# Altium PCB QI9-2604-A01_.PcbDoc (part 1 of 2)
Units mm, origin at the board's own origin, x right, y up, seen from the top; angles counter-clockwise.
Board outline 152.4 x 101.6 mm, 2 copper layers (Top Layer, Bottom Layer); 241 components, 189 nets, 865 pads, 74 vias.
Unrouted connection lines stored in the file: 153.
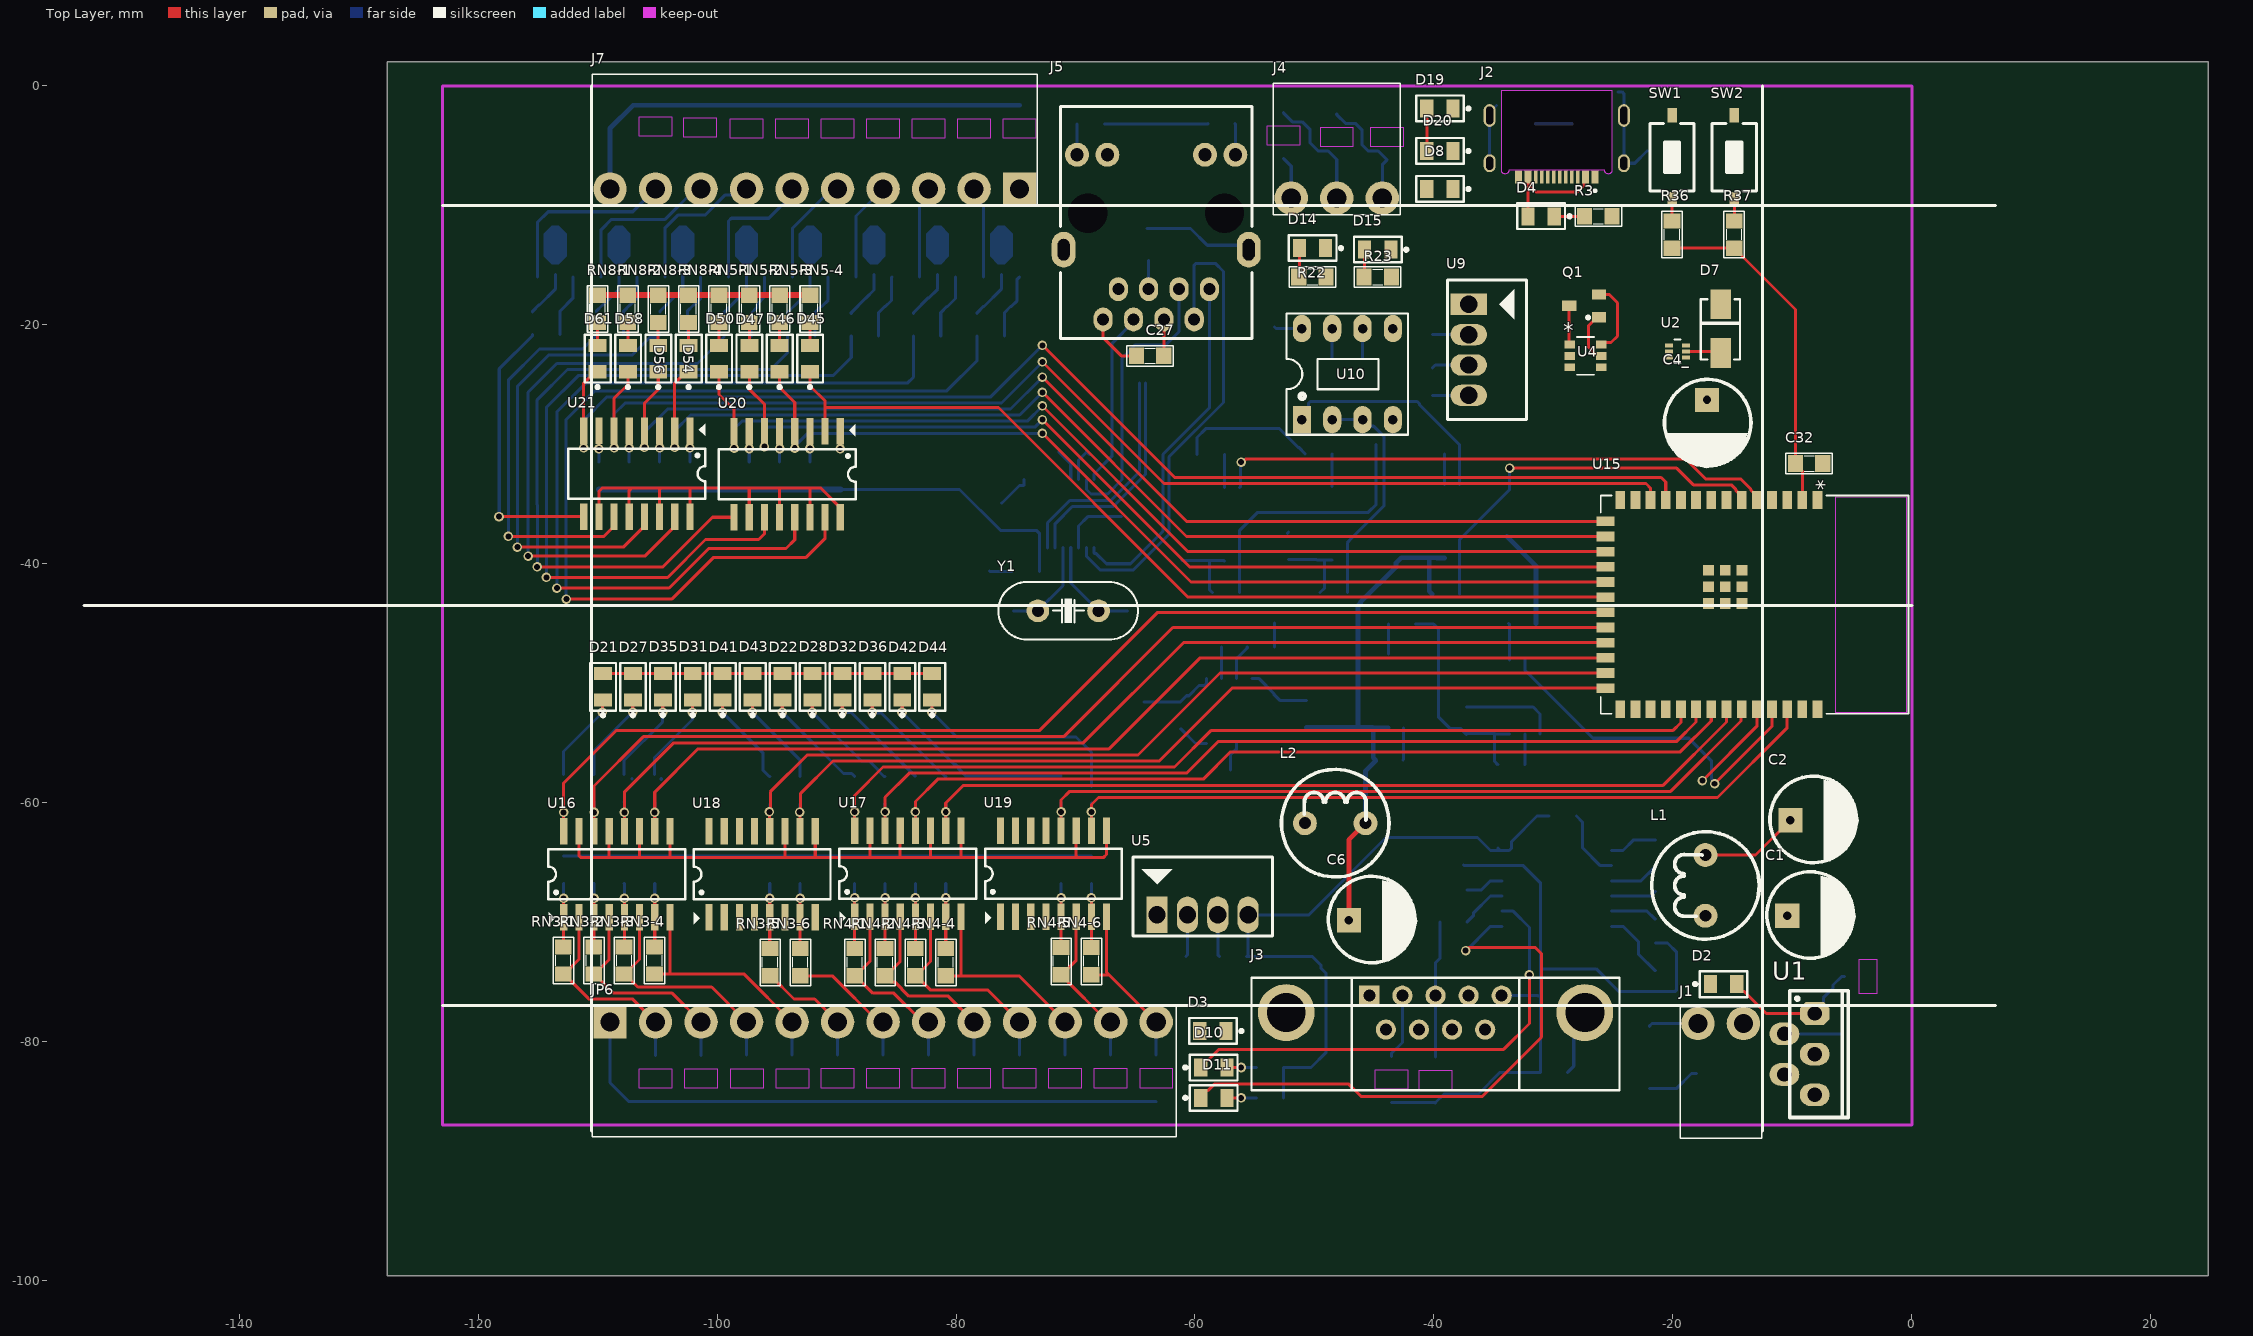
[diagram p0: Top Layer view]
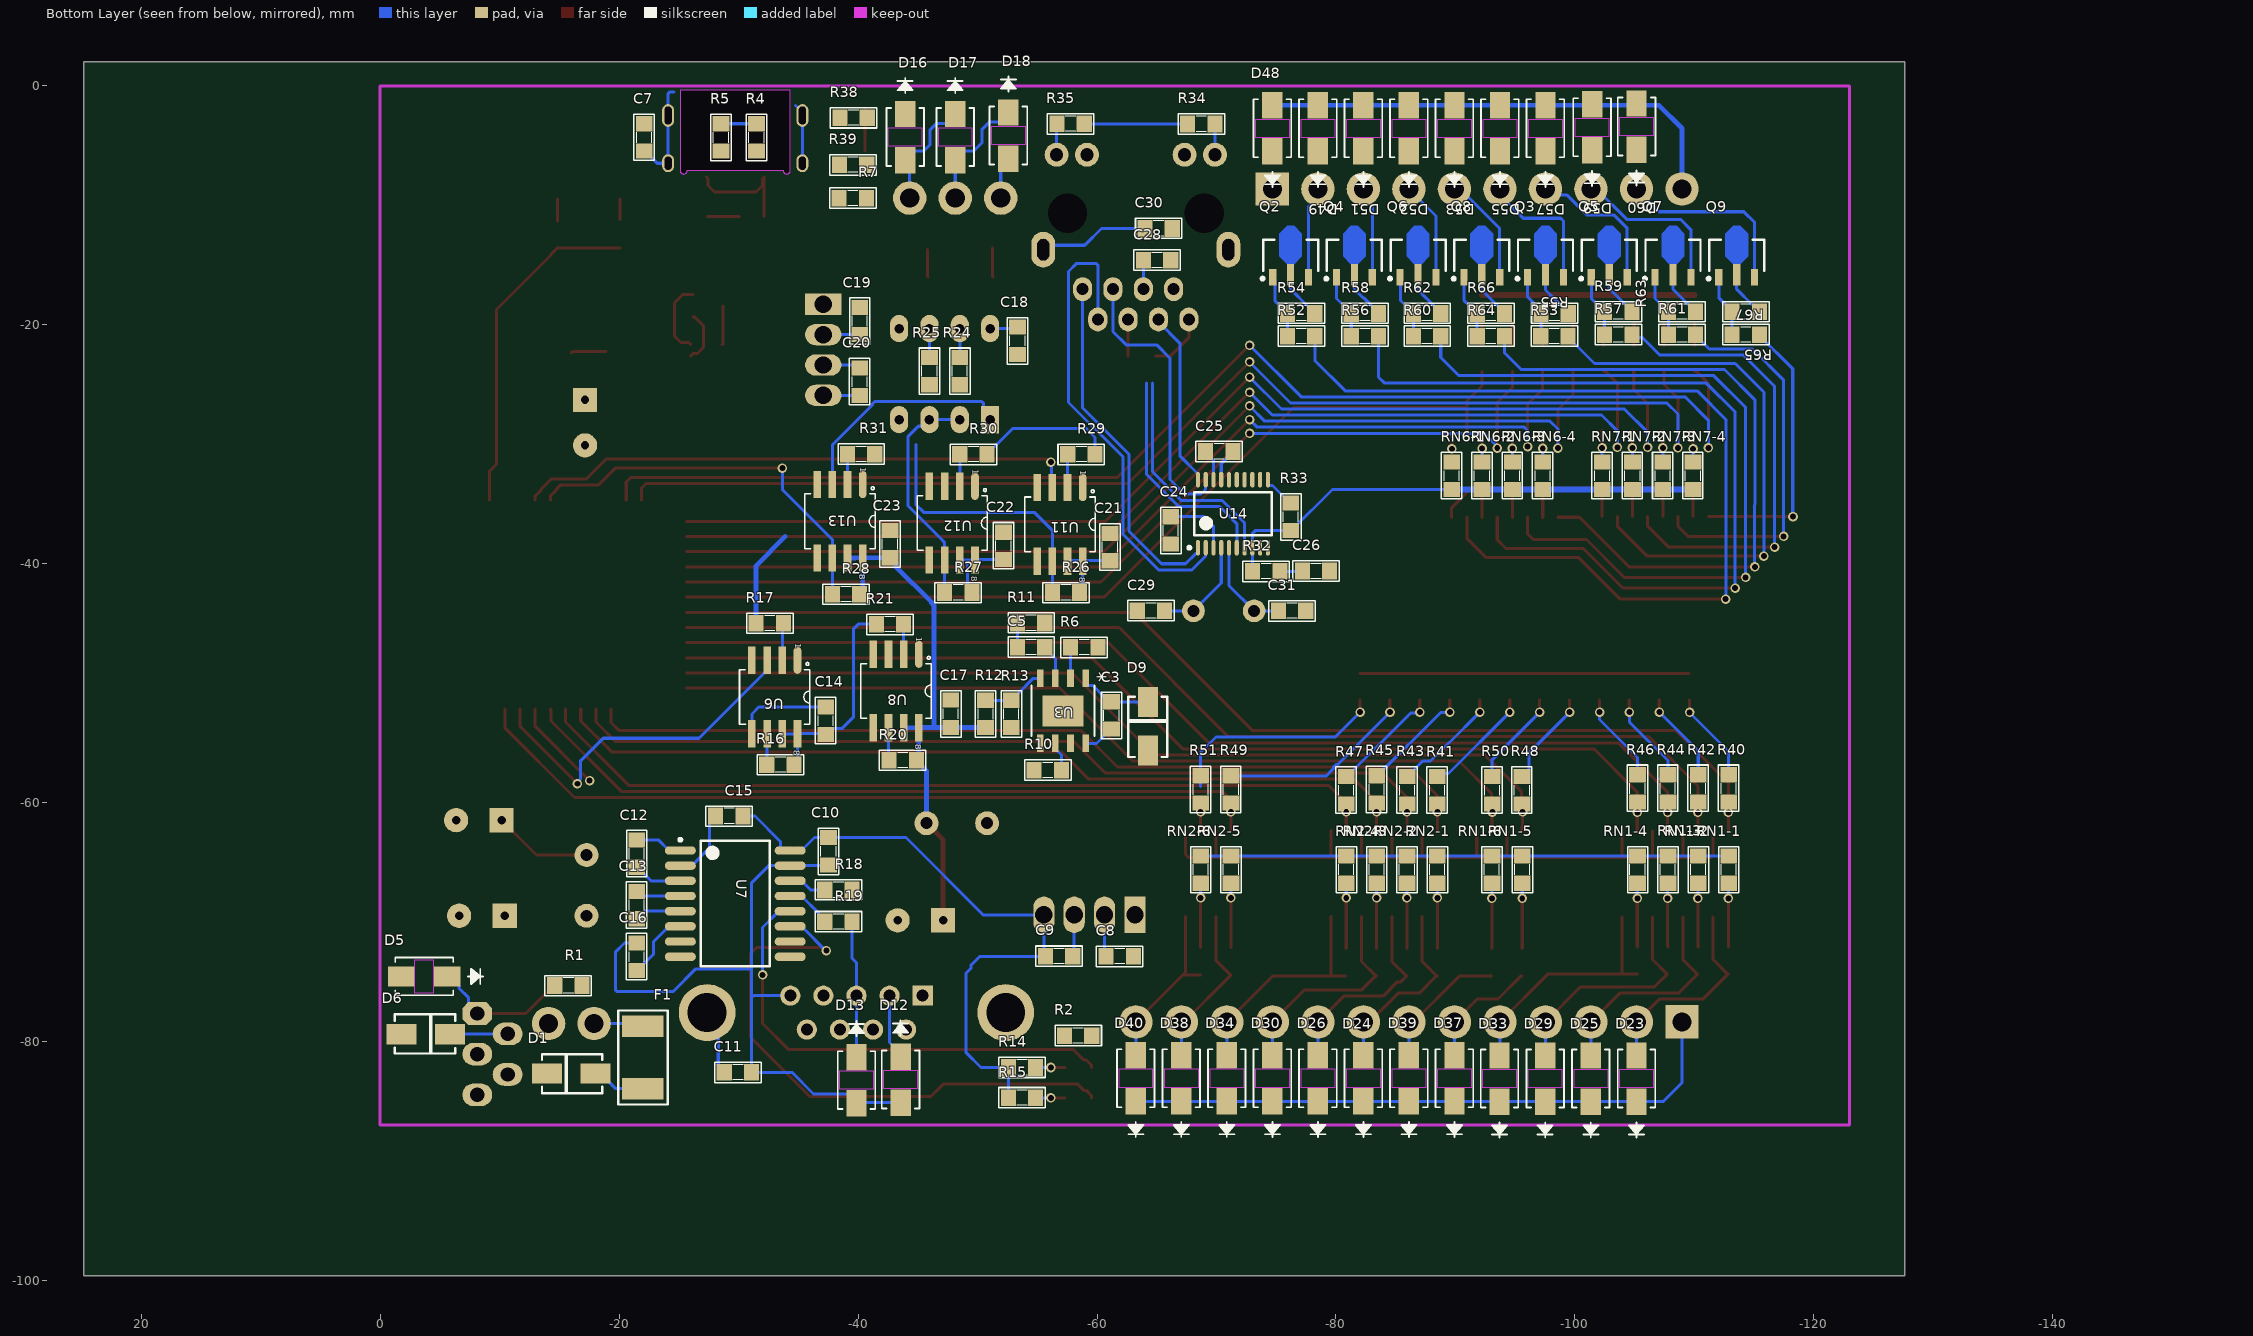
[diagram p1: Bottom Layer view, seen from below]
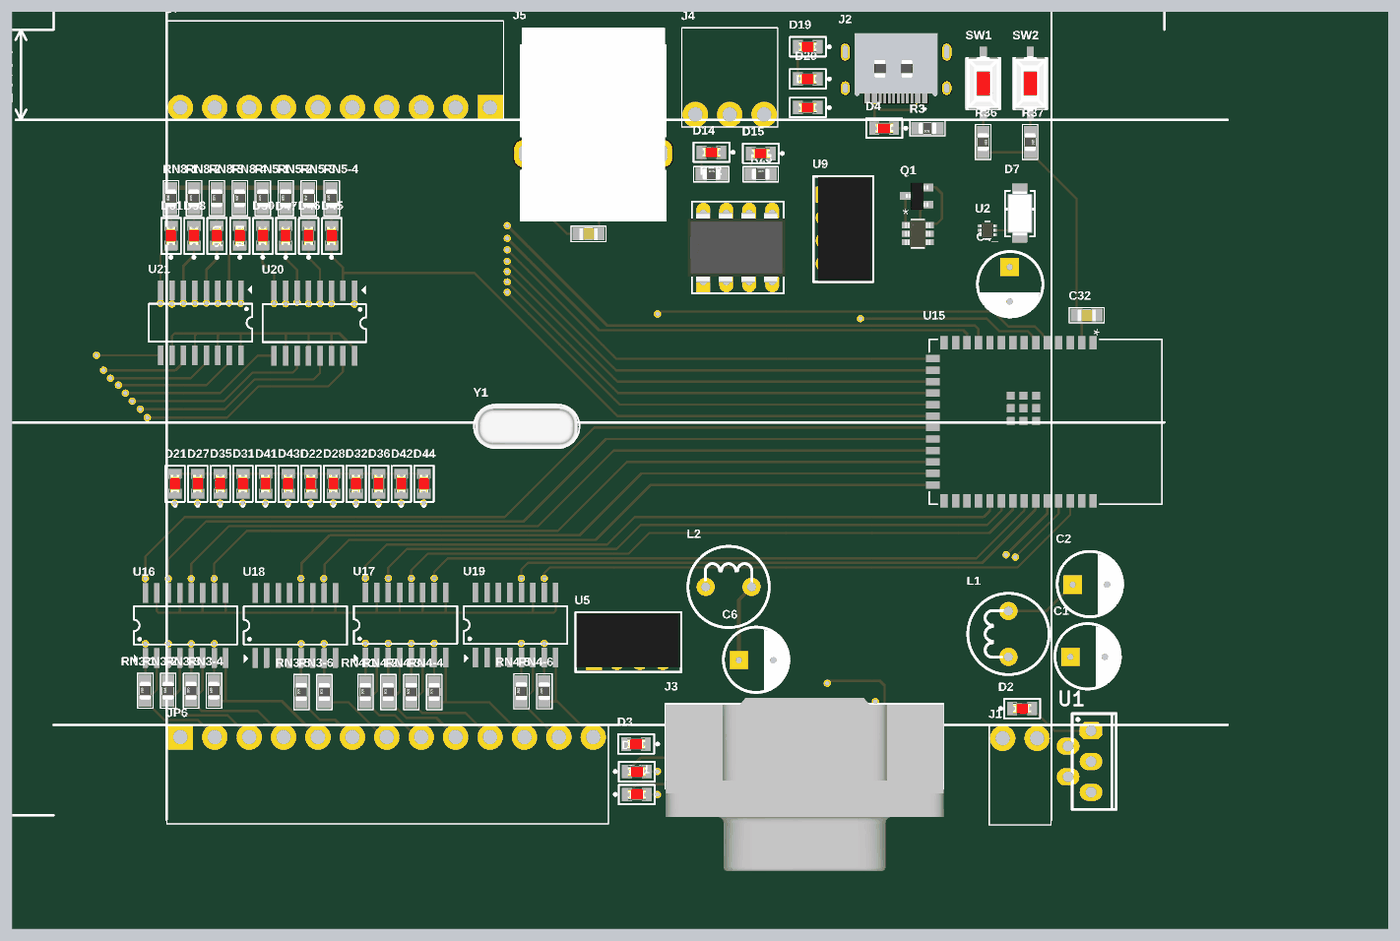
[diagram p3: 3D render of the assembled board from above, using the file's embedded part models]
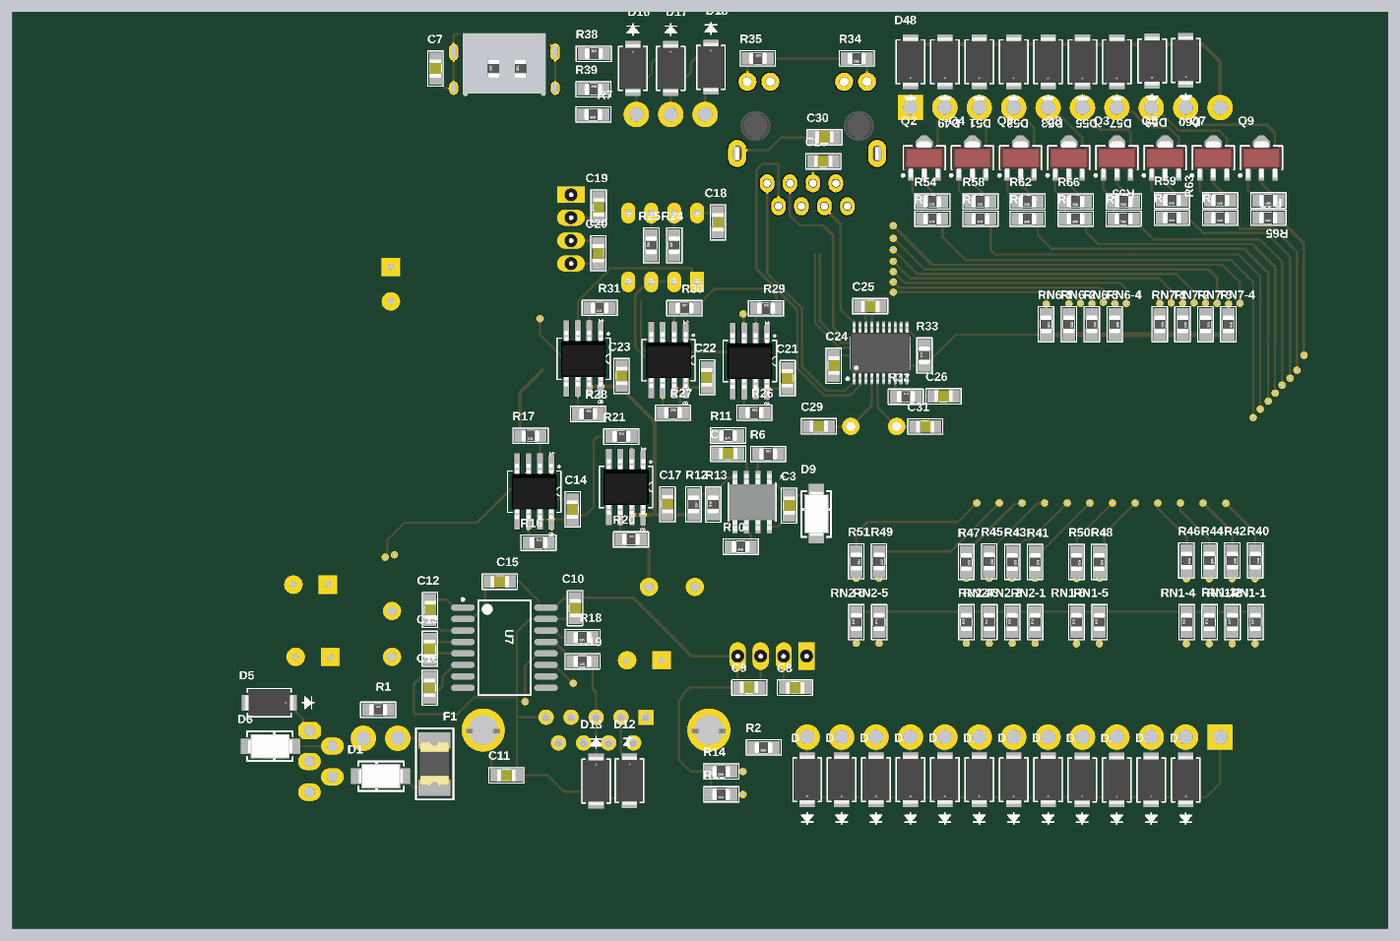
[diagram p4: 3D render of the assembled board from below, using the file's embedded part models]

## Layer stack, top to bottom
Top Solder: solder mask 0.0102, Solder Resist, Dk 3.5
Top Layer: signal copper 0.0356
Dielectric 1: dielectric 0.32, FR-4, Dk 4.8
Bottom Layer: signal copper 0.0356
Bottom Solder: solder mask 0.0102, Solder Resist, Dk 3.5

## Board outline
-127.6,-99.6 24.8,-99.6 24.8,2 -127.6,2

## Design rules (kind name [scope] priority, off if disabled: settings)
Clearance [All] p1: gap=0.254 ignorepadtopadclearanceinfootprint=FALSE
PolygonConnect [All] p1: connectstyle=Relief reliefconductorwidth=0.254 reliefentries=4 polygonreliefangle="90 Angle" airgapwidth=0.254
RoutingVias [All] p1: holewidth=0.5 width=0.8 viastyle="Through Hole" minholewidth=0.3 minwidth=0.5 maxholewidth=0.7 maxwidth=1.2
SolderMaskExpansion [All] p1: expansion=0 istentingtop=FALSE
SupplyNets "Schematic Supply Nets_12" [InNet('VBUS')] p1: voltage=0.000
SupplyNets "Schematic Supply Nets_11" [InNet('3.3V')] p2: voltage=0.000
SupplyNets "Schematic Supply Nets_10" [InNet('OCOM_N')] p3: voltage=0.000
SupplyNets "Schematic Supply Nets_9" [InNet('GND_RS485')] p4: voltage=0.000
SupplyNets "Schematic Supply Nets_8" [InNet('5V_RS232')] p5: voltage=0.000
SupplyNets "Schematic Supply Nets_7" [InNet('5V_RS485')] p6: voltage=0.000
SupplyNets "Schematic Supply Nets_6" [InNet('5VP')] p7: voltage=0.000
SupplyNets "Schematic Supply Nets_5" [InNet('GND_RS232')] p8: voltage=0.000
SupplyNets "Schematic Supply Nets_4" [InNet('24V')] p9: voltage=0.000
SupplyNets "Schematic Supply Nets_3" [InNet('OCOM_P')] p10: voltage=0.000
SupplyNets "Schematic Supply Nets_2" [InNet('5V')] p11: voltage=0.000
SupplyNets "Schematic Supply Nets_1" [InNet('GND')] p12: voltage=0.000
SupplyNets "Schematic Supply Nets" [InNet('ICOM')] p13: voltage=0.000
Width [All] p1: maxlimit=0.254 minlimit=0.254 preferedwidth=0.254
30 further rules are at their usual default settings.

## Components (designator, comment, footprint, x,y, rotation, side; value= is the part's Value field where it differs from the comment)
C1 "Cap2" C2 -10.414,-69.469 r90 top value=220uF/50V
C2 "" C2 -10.16,-61.468 r90 top value=220uF,16V
C3 "Cap" 0805 -61.214,-52.705 r90 bottom value=104
C4_ "Cap2" C2 -17.145,-26.289 r0 top value=220uF/50V
C5 "Cap" 0805 -54.483,-46.99 r0 bottom value=220
C6 "Cap2" C2 -47.117,-69.85 r90 top value=220uF/50V
C7 "Cap" 0805 -22.098,-4.318 r270 bottom value=4.7nF
C8 "Cap" 0805 -61.9,-72.865 r180 bottom value=4.7uF
C9 "Cap" 0805 -56.82,-72.865 r0 bottom value=22uF
C10 "Cap" 0805 -37.521,-64.069 r90 bottom value=104
C11 "Cap" 0805 -29.946,-82.572 r180 bottom value=4.7nF
C12 "Cap" 0805 -21.463,-64.262 r90 bottom value=22uF
C13 "Cap" 0805 -21.463,-68.58 r270 bottom value=22uF
C14 "Cap" 0805 -37.287,-53.143 r270 bottom value=104
C15 "Cap" 0805 -29.213,-61.124 r180 bottom value=22uF
C16 "Cap" 0805 -21.463,-72.898 r270 bottom value=22uF
C17 "Cap" 0805 -47.752,-52.557 r90 bottom value=104
C18 "Cap" 0805 -53.34,-21.336 r90 bottom value=104
C19 "Cap" 0805 -40.132,-19.685 r90 bottom value=4.7uF
C20 "Cap" 0805 -40.132,-24.765 r270 bottom value=22uF
C21 "Cap" 0805 -61.087,-38.608 r270 bottom value=104
C22 "Cap" 0805 -52.173,-38.507 r270 bottom value=104
C23 "Cap" 0805 -42.672,-38.354 r90 bottom value=104
C24 "Cap" 0805 -66.167,-37.211 r90 bottom value=104
C25 "Cap" 0805 -70.231,-30.607 r180 bottom value=104
C26 "Cap" 0805 -78.329,-40.619 r0 bottom value=104
C27 "Cap" 0805 -63.754,-22.606 r0 top value=1nF
C28 "Cap" 0805 -65.024,-14.605 r0 bottom value=1nF
C29 "Cap" 0805 -64.516,-43.942 r0 bottom value=22pF
C30 "Cap" 0805 -65.151,-11.938 r0 bottom value=4.7nF
C31 "Cap" 0805 -76.327,-43.942 r180 bottom value=22pF
C32 "Cap" 0805 -8.591,-31.609 r0 top value=104
D1 "1N5822" DIODE_DO214AC_SMA -16.002,-82.677 r0 bottom
D2 "LED" LED_0805_RED -15.748,-75.184 r180 top
D3 "LED" LED_0805_RED -58.504,-79.121 r0 top
D4 "LED" LED_0805_RED -31.031,-10.922 r0 top
D5 "SMAJ30CA" SMA_STM -3.683,-74.549 r0 bottom value=SMAJ30A
D6 "1N5822" DIODE_DO214AC_SMA -3.81,-79.375 r180 bottom
D7 "1N5822" DIODE_DO214AC_SMA -16.002,-20.32 r90 top
D8 "LED" LED_0805_RED -39.497,-8.636 r0 top
D9 "1N5822" DIODE_DO214AC_SMA -64.262,-53.594 r90 bottom
D10 "LED" LED_0805_RED -58.42,-82.169 r180 top
D11 "LED" LED_0805_RED -58.42,-84.709 r180 top
D12 "SMAJ15CA" SMA_STM -43.561,-83.185 r270 bottom value=SMAJ30A
D13 "SMAJ15CA" SMA_STM -39.866,-83.229 r270 bottom value=SMAJ30A
D14 "LED" LED_0805_RED -50.165,-13.589 r0 top
D15 "LED" LED_0805_RED -44.704,-13.716 r0 top
D16 "SMAJ9CA" SMA_STM -43.942,-4.293 r270 bottom value=SMAJ30A
D17 "SMAJ9CA" SMA_STM -48.133,-4.293 r270 bottom value=SMAJ30A
D18 "SMAJ9CA" SMA_STM -52.578,-4.166 r270 bottom value=SMAJ30A
D19 "LED" LED_0805_RED -39.497,-1.905 r0 top
D20 "LED" LED_0805_RED -39.497,-5.461 r0 top
D21 "LED" LED_0805_RED -109.557,-50.295 r270 top
D22 "LED" LED_0805_RED -94.525,-50.295 r270 top
D23 "SMAJ30CA" SMA_STM -105.156,-83.096 r90 bottom value=SMAJ30A
D24 "SMAJ30CA" SMA_STM -82.296,-83.071 r90 bottom value=SMAJ30A
D25 "SMAJ30CA" SMA_STM -101.334,-83.096 r90 bottom value=SMAJ30A
D26 "SMAJ30CA" SMA_STM -78.486,-83.071 r90 bottom value=SMAJ30A
D27 "LED" LED_0805_RED -107.052,-50.295 r270 top
D28 "LED" LED_0805_RED -92.02,-50.295 r270 top
D29 "SMAJ30CA" SMA_STM -97.513,-83.096 r90 bottom value=SMAJ30A
D30 "SMAJ30CA" SMA_STM -74.676,-83.071 r90 bottom value=SMAJ30A
D31 "LED" LED_0805_RED -102.041,-50.295 r270 top
D32 "LED" LED_0805_RED -89.514,-50.295 r270 top
D33 "SMAJ30CA" SMA_STM -93.691,-83.096 r90 bottom value=SMAJ30A
D34 "SMAJ30CA" SMA_STM -70.866,-83.071 r90 bottom value=SMAJ30A
D35 "LED" LED_0805_RED -104.547,-50.295 r270 top
D36 "LED" LED_0805_RED -87.009,-50.295 r270 top
D37 "SMAJ30CA" SMA_STM -89.916,-83.071 r90 bottom value=SMAJ30A
D38 "SMAJ30CA" SMA_STM -67.056,-83.071 r90 bottom value=SMAJ30A
D39 "SMAJ30CA" SMA_STM -86.106,-83.071 r90 bottom value=SMAJ30A
D40 "SMAJ30CA" SMA_STM -63.246,-83.071 r90 bottom value=SMAJ30A
D41 "LED" LED_0805_RED -99.536,-50.295 r270 top
D42 "LED" LED_0805_RED -84.504,-50.295 r270 top
D43 "LED" LED_0805_RED -97.031,-50.295 r270 top
D44 "LED" LED_0805_RED -81.998,-50.295 r270 top
D45 "LED" LED_0805_RED -92.226,-22.829 r270 top
D46 "LED" LED_0805_RED -94.766,-22.829 r270 top
D47 "LED" LED_0805_RED -97.306,-22.829 r270 top
D48 "SMAJ30CA" SMA_STM -74.676,-3.556 r90 bottom value=SMAJ30A
D49 "SMAJ30CA" SMA_STM -78.486,-3.556 r90 bottom value=SMAJ30A
D50 "LED" LED_0805_RED -99.846,-22.829 r270 top
D51 "SMAJ30CA" SMA_STM -82.296,-3.556 r90 bottom value=SMAJ30A
D52 "SMAJ30CA" SMA_STM -86.106,-3.556 r90 bottom value=SMAJ30A
D53 "SMAJ30CA" SMA_STM -89.916,-3.556 r90 bottom value=SMAJ30A
D54 "LED" LED_0805_RED -102.386,-22.829 r270 top
D55 "SMAJ30CA" SMA_STM -93.726,-3.556 r90 bottom value=SMAJ30A
D56 "LED" LED_0805_RED -104.926,-22.829 r270 top
D57 "SMAJ30CA" SMA_STM -97.536,-3.556 r90 bottom value=SMAJ30A
D58 "LED" LED_0805_RED -107.466,-22.829 r270 top
D59 "SMAJ30CA" SMA_STM -101.44,-3.47 r90 bottom value=SMAJ30A
D60 "SMAJ30CA" SMA_STM -105.162,-3.409 r90 bottom value=SMAJ30A
D61 "LED" LED_0805_RED -110.006,-22.829 r270 top
F1 "3A" FUSE_1812(4532) -21.971,-81.332 r270 bottom
J1 "KF-3.810-2R" KF2-3.81 -17.907,-78.486 r0 top
J2 "UJ20-C-H-G-MSMT-4-P16-TR" UJ20-C-H-G-MSMT-4-P16-TR -29.718,-0.381 r180 top
J3 "D Connector 9" DSUB1.385-2H9 -39.866,-77.574 r90 top
J4 "KF-3.81-3R" KF3-3.81 -44.323,-9.398 r180 top
J5 "HR911105A" HR911105A -63.246,-10.668 r0 top
J7 "KF-3.81-10R" KF10-3.81 -74.676,-8.636 r180 top value="Connector 10"
JP6 "HEADER 13" kf13-3.81 -108.966,-78.359 r0 top
L1 "Inductor" L1A -17.272,-69.469 r90 top value=33uH
L2 "Inductor" L1A -50.8,-61.722 r0 top value=10uH
Q1 "A0347A" SOT23_ -27.432,-18.415 r90 top
Q2 "BCX56" SOT89 -76.206,-14.214 r90 bottom value=C9014
Q3 "BCX56" SOT89 -97.542,-14.214 r90 bottom value=C9014
Q4 "BCX56" SOT89 -81.54,-14.214 r90 bottom value=C9014
Q5 "BCX56" SOT89 -102.876,-14.214 r90 bottom value=C9014
Q6 "BCX56" SOT89 -86.874,-14.214 r90 bottom value=C9014
Q7 "BCX56" SOT89 -108.21,-14.214 r90 bottom value=C9014
Q8 "BCX56" SOT89 -92.208,-14.214 r90 bottom value=C9014
Q9 "BCX56" SOT89 -113.544,-14.214 r90 bottom value=C9014
R1 "Res1" SM-RES-0805 -14.605,-75.311 r180 bottom value=2K2
R2 "Res1" SM-RES-0805 -59.563,-79.502 r0 bottom value=330
R3 "Res1" SM-RES-0805 -25.105,-10.922 r180 top value=360
R4 "Res1" SM-RES-0805 -31.494,-5.461 r90 bottom value=5K1
R5 "Res1" SM-RES-0805 -28.523,-5.461 r90 bottom value=5K1
R6 "Res1" SM-RES-0805 -57.785,-46.99 r180 bottom value=5K1
R7 "Res1" SM-RES-0805 -40.702,-9.398 r0 bottom value=360
R10 "Res1" SM-RES-0805 -57.023,-57.277 r0 bottom value=200K
R11 "Res1" SM-RES-0805 -55.626,-44.958 r0 bottom value=68K
R12 "Res1" SM-RES-0805 -50.673,-51.435 r270 bottom value=5K1
R13 "Res1" SM-RES-0805 -52.832,-53.721 r90 bottom value=1K6
R14 "Res1" SM-RES-0805 -54.864,-82.169 r0 bottom value=360
R15 "Res1" SM-RES-0805 -54.864,-84.709 r0 bottom value=360
R16 "Res1" SM-RES-0805 -32.361,-56.819 r180 bottom value=5k1
R17 "Res1" SM-RES-0805 -33.747,-44.997 r0 bottom value=220
R18 "Res1" SM-RES-0805 -39.497,-67.31 r0 bottom value=0
R19 "Res1" SM-RES-0805 -39.497,-69.977 r0 bottom value=0
R20 "Res1" SM-RES-0805 -42.595,-56.443 r180 bottom value=5k1
R21 "Res1" SM-RES-0805 -41.529,-45.064 r180 bottom value=360
R22 "Res1" SM-RES-0805 -51.308,-16.002 r0 top value=360
R23 "Res1" SM-RES-0805 -45.847,-16.002 r0 top value=360
R24 "Res1" SM-RES-0805 -48.514,-25.019 r90 bottom value=0
R25 "Res1" SM-RES-0805 -45.974,-25.019 r90 bottom value=0
R26 "Res1" SM-RES-0805 -56.261,-42.418 r180 bottom value=5k1
R27 "Res1" SM-RES-0805 -47.244,-42.418 r180 bottom value=5k1
R28 "Res1" SM-RES-0805 -37.846,-42.545 r180 bottom value=5k1
R29 "Res1" SM-RES-0805 -57.547,-30.849 r180 bottom value=220
R30 "Res1" SM-RES-0805 -48.514,-30.836 r180 bottom value=220
R31 "Res1" SM-RES-0805 -41.393,-30.836 r0 bottom value=360
R32 "Res1" SM-RES-0805 -73.025,-40.64 r180 bottom value=0
R33 "Res1" SM-RES-0805 -76.214,-37.211 r90 bottom value=5K1
R34 "Res1" SM-RES-0805 -69.873,-3.2 r0 bottom value=220
R35 "Res1" SM-RES-0805 -56.642,-3.175 r180 bottom value=220
R36 "Res1" SM-RES-0805 -20.066,-11.303 r270 top value=5k1
R37 "Res1" SM-RES-0805 -14.859,-11.303 r270 top value=5k1
R38 "Res1" SM-RES-0805 -38.481,-2.667 r180 bottom value=220
R39 "Res1" SM-RES-0805 -38.441,-6.604 r180 bottom value=220
R40 "Res1" SM-RES-0805 -112.866,-57.663 r270 bottom value=220
R41 "Res1" SM-RES-0805 -88.482,-57.82 r270 bottom value=220
R42 "Res1" SM-RES-0805 -110.326,-57.663 r270 bottom value=220
R43 "Res1" SM-RES-0805 -85.968,-57.82 r270 bottom value=220
R44 "Res1" SM-RES-0805 -107.786,-57.663 r270 bottom value=220
R45 "Res1" SM-RES-0805 -83.402,-57.756 r270 bottom value=220
R46 "Res1" SM-RES-0805 -105.246,-57.663 r270 bottom value=220
R47 "Res1" SM-RES-0805 -80.862,-57.82 r270 bottom value=220
R48 "Res1" SM-RES-0805 -95.569,-57.82 r270 bottom value=220
R49 "Res1" SM-RES-0805 -71.21,-57.756 r270 bottom value=220
R50 "Res1" SM-RES-0805 -93.08,-57.82 r270 bottom value=220
R51 "Res1" SM-RES-0805 -68.67,-57.756 r270 bottom value=220
R52 "Res1" SM-RES-0805 -78.232,-20.955 r0 bottom value=2K2
R53 "Res1" SM-RES-0805 -99.422,-20.955 r0 bottom value=2K2
R54 "Res1" SM-RES-0805 -78.232,-19.05 r0 bottom value=510
R55 "Res1" SM-RES-0805 -99.441,-19.05 r0 bottom value=510
R56 "Res1" SM-RES-0805 -83.566,-20.955 r0 bottom value=2K2
R57 "Res1" SM-RES-0805 -104.775,-20.828 r0 bottom value=2K2
R58 "Res1" SM-RES-0805 -83.566,-19.05 r0 bottom value=510
R59 "Res1" SM-RES-0805 -104.775,-18.923 r0 bottom value=510
R60 "Res1" SM-RES-0805 -88.773,-20.955 r0 bottom value=2K2
R61 "Res1" SM-RES-0805 -110.109,-20.828 r0 bottom value=2K2
R62 "Res1" SM-RES-0805 -88.773,-19.05 r0 bottom value=510
R63 "Res1" SM-RES-0805 -110.109,-18.923 r0 bottom value=510
R64 "Res1" SM-RES-0805 -94.107,-20.955 r0 bottom value=2K2
R65 "Res1" SM-RES-0805 -115.443,-20.828 r0 bottom value=2K2
R66 "Res1" SM-RES-0805 -94.107,-19.05 r0 bottom value=510
R67 "Res1" SM-RES-0805 -115.443,-18.923 r0 bottom value=510
RN1-1 "Res1" SM-RES-0805 -112.866,-66.75 r90 bottom value=2K2
RN1-2 "Res1" SM-RES-0805 -110.326,-66.75 r90 bottom value=2K2
RN1-3 "Res1" SM-RES-0805 -107.786,-66.75 r90 bottom value=2K2
RN1-4 "Res1" SM-RES-0805 -105.246,-66.75 r90 bottom value=2K2
RN1-5 "Res1" SM-RES-0805 -95.594,-66.75 r90 bottom value=2K2
RN1-6 "Res1" SM-RES-0805 -93.054,-66.75 r90 bottom value=2K2
RN2-1 "Res1" SM-RES-0805 -88.482,-66.75 r90 bottom value=2K2
RN2-2 "Res1" SM-RES-0805 -85.942,-66.75 r90 bottom value=2K2
RN2-3 "Res1" SM-RES-0805 -83.402,-66.75 r90 bottom value=2K2
RN2-4 "Res1" SM-RES-0805 -80.862,-66.75 r90 bottom value=2K2
RN2-5 "Res1" SM-RES-0805 -71.21,-66.75 r90 bottom value=2K2
RN2-6 "Res1" SM-RES-0805 -68.67,-66.75 r90 bottom value=2K2
RN3-1 "Res1" SM-RES-0805 -112.866,-74.358 r90 top value=510
RN3-2 "Res1" SM-RES-0805 -110.326,-74.358 r90 top value=510
RN3-3 "Res1" SM-RES-0805 -107.786,-74.358 r90 top value=510
RN3-4 "Res1" SM-RES-0805 -105.246,-74.358 r90 top value=510
RN3-5 "Res1" SM-RES-0805 -95.569,-74.497 r90 top value=510
RN3-6 "Res1" SM-RES-0805 -93.029,-74.497 r90 top value=510
RN4-1 "Res1" SM-RES-0805 -88.482,-74.497 r90 top value=510
RN4-2 "Res1" SM-RES-0805 -85.942,-74.497 r90 top value=510
RN4-3 "Res1" SM-RES-0805 -83.402,-74.497 r90 top value=510
RN4-4 "Res1" SM-RES-0805 -80.862,-74.497 r90 top value=510
RN4-5 "Res1" SM-RES-0805 -71.21,-74.411 r90 top value=510
RN4-6 "Res1" SM-RES-0805 -68.67,-74.411 r90 top value=510
RN5-1 "Res1" SM-RES-0805 -99.847,-19.813 r90 top value=220
RN5-2 "Res1" SM-RES-0805 -97.306,-19.813 r90 top value=220
RN5-3 "Res1" SM-RES-0805 -94.765,-19.813 r90 top value=220
RN5-4 "Res1" SM-RES-0805 -92.224,-19.813 r90 top value=220
RN6-1 "Res1" SM-RES-0805 -89.69,-31.496 r270 bottom value=360
RN6-2 "Res1" SM-RES-0805 -92.23,-31.496 r270 bottom value=360
RN6-3 "Res1" SM-RES-0805 -94.77,-31.496 r270 bottom value=360
RN6-4 "Res1" SM-RES-0805 -97.31,-31.496 r270 bottom value=360
RN7-1 "Res1" SM-RES-0805 -102.287,-31.496 r270 bottom value=360
RN7-2 "Res1" SM-RES-0805 -104.816,-31.496 r270 bottom value=360
RN7-3 "Res1" SM-RES-0805 -107.36,-31.496 r270 bottom value=360
RN7-4 "Res1" SM-RES-0805 -109.883,-31.496 r270 bottom value=360
RN8-1 "Res1" SM-RES-0805 -110.011,-19.813 r90 top value=220
RN8-2 "Res1" SM-RES-0805 -107.47,-19.813 r90 top value=220
RN8-3 "Res1" SM-RES-0805 -104.929,-19.813 r90 top value=220
RN8-4 "Res1" SM-RES-0805 -102.388,-19.813 r90 top value=220
SW1 "SW-SMD" SW-SMD -20.066,-5.969 r270 top
SW2 "SW-SMD" SW-SMD -14.859,-5.969 r90 top
U1 "LM2576HVT-5.0" T05 -8.128,-77.655 r270 top
U2 "USBLC6-2P6" SOT-666_STM -19.61,-22.225 r0 top
U3 "MP1584EN-LF-Z" SOIC8E_MPS -57.15,-52.324 r270 bottom
U4 "LTC4412ES6#TRMPBF" SOT-6_S_LIT -27.305,-22.606 r0 top
U5 "B0505S" B0505S -63.171,-69.387 r0 top
U6 "HCPL-0600" SOIC8_50_328_25X90_SMT -33.021,-51.16 r270 bottom
U7 "SP232" soic16_m -29.718,-68.453 r180 bottom
U8 "HCPL-0600" SOIC8_50_328_25X90_SMT -43.18,-50.652 r270 bottom
U9 "B0505S" B0505S -37.084,-18.288 r270 top
U10 "MAX485" DIP8 -47.371,-24.13 r0 top
U11 "HCPL-0600" SOIC8_50_328_25X90_SMT -56.896,-36.703 r270 bottom
U12 "HCPL-0600" SOIC8_50_328_25X90_SMT -47.879,-36.607 r270 bottom
U13 "HCPL-0600" SOIC8_50_328_25X90_SMT -38.481,-36.449 r270 bottom
U14 "CH9121t" tssop20 -71.374,-35.814 r90 bottom
U15 "ESP32-S3-WROOM-1-N8" ESP32-S3-WROOM-1_EXP -13.154,-43.434 r270 top
U16 "TL2904" SOP16 -108.396,-65.988 r0 top
U17 "TL2904" SOP16 -84.037,-65.944 r0 top
U18 "TL2904" SOP16 -96.229,-65.988 r0 top
U19 "TL2904" SOP16 -71.845,-65.944 r0 top
U20 "TL2904" SOP16 -94.135,-32.512 r180 top
U21 "TL2904" SOP16 -106.723,-32.464 r180 top
Y1 "25 MHZ" CRYSTAL -70.612,-43.942 r180 top

## Footprints (in the part's own frame and the unit in brackets; to place one, negate y for a bottom-side part, rotate by r counter-clockwise, add the part's x,y. Pads: shape width x height; smd on the part's side, far side on the other; paste and mask are expansions set on the pad)
0805 [mil] "Compoment SMD 80x50mil"
  rect 50x55 smd: 1(-45,0) 2(45,0)
  silkscreen extent -77,-34 76,33, body extent -40,-27 40,23, height 24
B0505S [mil]
  rect 70x120 hole 57: 1(0,0)
  oval 70x120 hole 57: 2(100,0) 3(200,0) 4(300,0)
  silkscreen extent -80,-70 380,190, body extent -76,-50 376,186, height 394
C2 [mil]
  rect 80x80 hole 27.56: 1(0,0)
  round 80 hole 27.56: 2(0,-150)
  silkscreen extent -140,-225 145,67
CRYSTAL [mm] "Thach Anh Dan 5.08mm"
  round 1.905 hole 1: 1(-2.54,0) 2(2.54,0)
  silkscreen extent -5.84,-2.41 5.85,2.41, body extent -5.64,-2.29 5.71,2.36, height 3.5
DIODE_DO214AC_SMA [mm] "Diode 2214AC- SMA type"
  rect 2.5x1.7 smd: 1(-2.032,0) 2(2.032,0)
  silkscreen extent -2.59,-1.63 2.46,1.7, body extent -2.53,-1.35 2.47,1.35, height 2.25
DIP8 [mil] "DIP, 8-Leads, Row Spacing 7.62mm, Pitch 2.54mm, Body 9.91x6.73mm"
  rect 60x90 hole 31: 1(-145,-150)
  oval 60x90 hole 31: 2(-45,-150) 3(55,-150) 4(155,-150) 5(155,150) 6(55,150) 7(-45,150) 8(-145,150)
  silkscreen extent -195,-200 205,200, body extent -213,-153 213,153, height 177
DSUB1.385-2H9 [mm] "Connector; D Subminiature; 9 Position; Right Angle; Pitch 1.385 mm"
  rect 1.69x1.69 hole 1: 1(1.42,5.54)
  round 1.69 hole 1: 2(1.42,2.77) 3(1.42,0) 4(1.42,-2.77) 5(1.42,-5.54) 6(-1.42,4.155) 7(-1.42,1.385) 8(-1.42,-1.385) 9(-1.42,-4.155)
  round 4.76 hole 3.26: 10(0,-12.495) 11(0,12.495)
  silkscreen extent -6.5,-15.4 2.9,15.4, body extent -15.62,-15.43 3.58,15.38, height 12.52
ESP32-S3-WROOM-1_EXP [mil]
  rect 59x32 smd paste+0 mask+0: 1(-344.49,207.09) 2(-344.49,157.09) 3(-344.49,107.09) 4(-344.49,57.09) 5(-344.49,7.09) 6(-344.49,-42.91) 7(-344.49,-92.91) 8(-344.49,-142.91) 9(-344.49,-192.91) 10(-344.49,-242.91) 11(-344.49,-292.91) 12(-344.49,-342.91) 13(-344.49,-392.91) 14(-344.49,-442.91) 27(344.49,-442.91) 28(344.49,-392.91) 29(344.49,-342.91) 30(344.49,-292.91) 31(344.49,-242.91) 32(344.49,-192.91) 33(344.49,-142.91) 34(344.49,-92.91) 35(344.49,-42.91) 36(344.49,7.09) 37(344.49,57.09) 38(344.49,107.09) 39(344.49,157.09) 40(344.49,207.09)
  rect 32x59 smd paste+0 mask+0: 15(-275,-492.13) 16(-225,-492.13) 17(-175,-492.13) 18(-125,-492.13) 19(-75,-492.13) 20(-25,-492.13) 21(25,-492.13) 22(75,-492.13) 23(125,-492.13) 24(175,-492.13) 25(225,-492.13) 26(275,-492.13)
  rect 35x35 smd paste+0 mask+0: 41(-59.06,-96.85) 42(-114.17,-41.73) 43(-114.17,-96.85) 44(-114.17,-151.97) 45(-59.06,-151.97) 46(-3.94,-151.97) 47(-3.94,-96.85) 48(-3.94,-41.73) 49(-59.06,-41.73)
  Top Layer keep-out region: 354.5,502 -354.5,502 -354.5,266 354.5,266
  silkscreen extent -360,-507 360,507
FUSE_1812(4532) [mm]
  rect 1.78x3.5 smd: 1(-2.615,0) 2(2.615,0)
  silkscreen extent -3.94,-2.06 3.94,2.11, body extent -2.43,-1.61 2.39,1.61, height 1.32
HR911105A [mm] "Hanrun HR911105A RJ-45 Connector"
  round 1 hole 3.3 unplated paste-2539.97 mask+0.15: 0(-5.715,0) 0(5.715,0)
  oval 1.6x2 hole 1 paste-2539.97 mask+0.15: 1(4.45,-6.35) 2(3.18,-8.89) 3(1.91,-6.35) 4(0.64,-8.89) 5(-0.63,-6.35) 6(-1.9,-8.89) 7(-3.17,-6.35) 8(-4.44,-8.89)
  round 2 hole 1.1 paste-2539.97 mask+0.15: 9(6.625,4.9) 10(4.085,4.9) 11(-4.085,4.9) 12(-6.625,4.9)
  oval 2x3 hole 1 slot 1.8 at 90 deg paste-2539.97 mask+0.15: 13(7.745,-3.05) 14(-7.745,-3.05)
  silkscreen extent -8,-10.48 8,8.92, body extent -7.94,-10.48 7.94,10.92, height 13.6
KF2-3.81 [mm] "3,81mm - modular - blue - Horizontal wire entry - Pressure clamp - 10mm height - 03p"
  round 2.8 hole 1.6: 1(0,0) 2(3.81,0)
  silkscreen extent -1.49,-9.6 5.33,1.4
KF3-3.81 [mm] "3,81mm - modular - blue - Horizontal wire entry - Pressure clamp - 10mm height - 03p"
  round 2.8 hole 1.6: 1(0,0) 2(3.81,0) 3(7.62,0)
  silkscreen extent -1.49,-9.6 9.12,1.4
KF10-3.81 [mm] "3,81mm - modular - blue - Horizontal wire entry - Pressure clamp - 10mm height - 03p"
  rect 2.8x2.8 hole 1.6: 1(0,0)
  round 2.8 hole 1.6: 2(3.81,0) 3(7.62,0) 4(11.43,0) 5(15.24,0) 6(19.05,0) 7(22.86,0) 8(26.67,0) 9(30.48,0) 10(34.29,0)
  silkscreen extent -1.49,-9.6 35.78,1.4
kf13-3.81 [mm] "3,81mm - modular - blue - Horizontal wire entry - Pressure clamp - 10mm height - 03p"
  rect 2.8x2.8 hole 1.6: 1(0,0)
  round 2.8 hole 1.6: 2(3.81,0) 3(7.62,0) 4(11.43,0) 5(15.24,0) 6(19.05,0) 7(22.86,0) 8(26.67,0) 9(30.48,0) 10(34.29,0) 11(38.1,0) 12(41.91,0) 13(45.72,0)
  silkscreen extent -1.49,-9.6 47.4,1.4
L1A [mm]
  round 2 hole 1: 1(0,0) 2(5.08,0)
  silkscreen extent -1.96,-4.5 7.04,4.5
LED_0805_RED [mm] "LED SMD; Body 2.0 x 1.3 mm (LxW typ)"
  rect 1.1x1.5 smd: 1(-1.1,0) 2(1.1,0)
  silkscreen extent -1.98,-1.07 2.52,1.09, body extent -1.01,-0.62 1.01,0.63, height 1.1
SM-RES-0805 [mil]
  rect 50x55 smd: 1(0,0) 2(90,0)
  silkscreen extent -32,-34 121,33, body extent 6,-25 84,25, height 31
SMA_STM [mil]
  rect 87x67 smd paste+0 mask+0: 1(-76,0) 2(76,0)
  Top Layer keep-out region: -30.5,-55 -30.5,55 30.5,55 30.5,-55
  Keep-Out Layer region: -30.5,-55 -30.5,55 30.5,55 30.5,-55
  silkscreen extent -194,-62 96,62, body extent -106,-57 106,57, height 104
SOIC8_50_328_25X90_SMT [mil] "SOIC"
  oval 90x25 smd mask+3: 1(-121.32,75)
  rect 90x25 smd mask+3: 2(-121.32,25) 3(-121.32,-25) 4(-121.32,-75) 5(121.32,-75) 6(121.32,-25) 7(121.32,25) 8(121.32,75)
  silkscreen extent -114,-116 90,116, body extent -121,-98 121,98, height 79
SOIC8E_MPS [mil]
  rect 57.5x22 smd paste+0 mask+0: 1(-107.25,75) 2(-107.25,25) 3(-107.25,-25) 4(-107.25,-75) 5(107.25,-75) 6(107.25,-25) 7(107.25,25) 8(107.25,75)
  rect 101x136 smd paste-67.5 mask+0: EPAD(0,0)
  silkscreen extent -84,-104 84,104, body extent -122,-99 122,99, height 67
soic16_m [mm] "16-Pin Small Outline Integrated Circuit Package (SOIC16), IPC Low Density"
  oval 2.6x0.7 smd: 1(-4.6,4.445) 2(-4.6,3.175) 3(-4.6,1.905) 4(-4.6,0.635) 5(-4.6,-0.635) 6(-4.6,-1.905) 7(-4.6,-3.175) 8(-4.6,-4.445) 9(4.6,-4.445) 10(4.6,-3.175) 11(4.6,-1.905) 12(4.6,-0.635) 13(4.6,0.635) 14(4.6,1.905) 15(4.6,3.175) 16(4.6,4.445)
  silkscreen extent -4.72,-5.25 2.9,5.47, body extent -3.75,-5.25 3.75,5.25, height 2.65
SOP16 [mm] "Small Outline; 16 Leads; Body Width 5.6 mm; Pitch 1.27 mm"
  rect 0.6x2.2 smd: 1(-4.445,-3.6) 1(-4.445,-3.6) 2(-3.175,-3.6) 2(-3.175,-3.6) 3(-1.905,-3.6) 3(-1.905,-3.6) 4(-0.635,-3.6) 4(-0.635,-3.6) 5(0.635,-3.6) 5(0.635,-3.6) 6(1.905,-3.6) 6(1.905,-3.6) 7(3.175,-3.6) 7(3.175,-3.6) 8(4.445,-3.6) 8(4.445,-3.6) 9(4.445,3.6) 9(4.445,3.6) 10(3.175,3.6) 10(3.175,3.6) 11(1.905,3.6) 11(1.905,3.6) 12(0.635,3.6) 12(0.635,3.6) 13(-0.635,3.6) 13(-0.635,3.6) 14(-1.905,3.6) 14(-1.905,3.6) 15(-3.175,3.6) 15(-3.175,3.6) 16(-4.445,3.6) 16(-4.445,3.6)
  silkscreen extent -5.73,-4.19 5.73,2.1
SOT23_ [mm] "SOT 23B"
  rect 0.85x1.2 smd: 1(-0.95,-1.25) 2(0,1.25) 3(0.94,-1.245)
  silkscreen extent -1.1,-0.46 -0.85,-0.21, body extent -1.5,-1.3 1.5,1.2, height 1.06
SOT89 [mm] "SOT89, 3-Leads, Body 4.55x2.55mm, Pitch 1.50mm, Lead Span 4.1mm, IPC Medium Density"
  rect 1.4x0.6 smd: 1(-1.8,1.5) 3(-1.8,-1.5)
  rect 1.8x0.6 smd: 2(-1.6,0)
  Top Layer region: -0.7,0.3 -0.05,0.95 1.85,0.95 2.5,0.3 2.5,-0.3 1.85,-0.95 -0.05,-0.95 -0.7,-0.3
  silkscreen extent -2.05,-2.3 1.32,2.48, body extent -2.16,-2.25 1.84,2.25, height 1.5
SOT-6_S_LIT [mil]
  rect 34.5x26 smd paste+0 mask+0: 1(-51.75,37.4) 2(-51.75,0) 3(-51.75,-37.4) 4(51.75,-37.4) 5(51.75,0) 6(51.75,37.4)
  silkscreen extent -28,-62 28,62, body extent -55,-57 55,57, height 39
SOT-666_STM [mil]
  rect 26.87x13 smd paste+0 mask+0: 1(-27.94,19.68) 2(-27.94,0) 3(-27.94,-19.69) 4(27.94,-19.69) 5(27.94,0) 6(27.94,19.68)
  silkscreen extent -10,-38 10,38, body extent -34,-34 34,34, height 25
SW-SMD [mm] "Switch SMD type"
  rect 1.2x0.8 smd: 1(-3.5,0) 2(3.5,0)
  silkscreen extent -2.82,-1.85 2.82,1.85, body extent -3.05,-1.85 3.05,1.85, height 2.5
T05 [mm]
  oct 1.9x2.5 hole 1.2: 1(0,0)
  oval 1.9x2.5 hole 1.2: 2(1.7,-2.54) 3(3.4,0) 4(5.1,-2.54) 5(6.8,0)
  silkscreen extent -1.9,-2.1 8.7,2.8, body extent -1.95,-2.15 8.75,2.85, height 19.6
tssop20 [mm] "TSSOP, 20-Leads, Body 6.50x4.40mm, Pitch 0.65mm, IPC High Density"
  oval 1.3x0.35 smd: 1(-2.85,2.925) 2(-2.85,2.275) 3(-2.85,1.625) 4(-2.85,0.975) 5(-2.85,0.325) 6(-2.85,-0.325) 7(-2.85,-0.975) 8(-2.85,-1.625) 9(-2.85,-2.275) 10(-2.85,-2.925) 11(2.85,-2.925) 12(2.85,-2.275) 13(2.85,-1.625) 14(2.85,-0.975) 15(2.85,-0.325) 16(2.85,0.325) 17(2.85,0.975) 18(2.85,1.625) 19(2.85,2.275) 20(2.85,2.925)
  silkscreen extent -2.97,-3.25 1.8,3.78, body extent -3.23,-3.3 3.23,3.3, height 1.25
UJ20-C-H-G-MSMT-4-P16-TR [mm]
  rect 0.6x1.1 smd paste+0 mask+0.102: A1_B12(-3.2,7.25) A4_B9(-2.4,7.25) B1_A12(3.2,7.25) B4_A9(2.4,7.25)
  rect 0.3x1.1 smd paste+0 mask+0.102: A5(-1.25,7.25) A6(-0.25,7.25) A7(0.25,7.25) A8(1.25,7.25) B5(1.75,7.25) B6(0.75,7.25) B7(-0.75,7.25) B8(-1.75,7.25)
  oval 1x1.5 hole 0.6 slot 1.1 at 90 deg mask+0.102: SH1(-5.62,6.1) SH2(5.62,6.1)
  oval 1x1.9 hole 0.6 slot 1.5 at 90 deg mask+0.102: SH3(-5.62,2.1) SH4(5.62,2.1)
  Keep-Out Layer board cut-out: 4.62,6.7 4.62,0 -4.62,0 -4.62,6.7 -4.62,6.716 -4.618,6.731 -4.616,6.747 -4.613,6.762 -4.61,6.778 -4.605,6.793 -4.6,6.808 -4.594,6.822 -4.587,6.836 -4.58,6.85 -4.572,6.863 -4.563,6.876 -4.553,6.889 -4.543,6.901 -4.532,6.912 -4.521,6.923 -4.509,6.933 -4.496,6.943 -4.483,6.952 -4.47,6.96 -4.456,6.967 -4.442,6.974 -4.428,6.98 -4.413,6.985 -4.398,6.99 -4.382,6.993 -4.367,6.996 -4.351,6.998 -4.336,7 -4.32,7 -4.304,7 -4.289,6.998 -4.273,6.996 -4.258,6.993 -4.242,6.99 -4.227,6.985 -4.212,6.98 -4.198,6.974 -4.184,6.967 -4.17,6.96 -4.157,6.952 -4.144,6.943 -4.131,6.933 -4.119,6.923 -4.108,6.912 -4.097,6.901 -4.087,6.889 -4.077,6.876 -4.068,6.863 -4.06,6.85 -4.053,6.836 -4.046,6.822 -4.04,6.808 -4.035,6.793 -4.03,6.778 -4.027,6.762 -4.024,6.747 -4.022,6.731 -4.02,6.716 -4.02,6.7 4.02,6.7 4.02,6.716 4.022,6.731 4.024,6.747 4.027,6.762 4.03,6.778 4.035,6.793 4.04,6.808 4.046,6.822 4.053,6.836 4.06,6.85 4.068,6.863 4.077,6.876 4.087,6.889 4.097,6.901 4.108,6.912 4.119,6.923 4.131,6.933 4.144,6.943 4.157,6.952 4.17,6.96 4.184,6.967 4.198,6.974 4.212,6.98 4.227,6.985 4.242,6.99 4.258,6.993 4.273,6.996 4.289,6.998 4.304,7 4.32,7 4.336,7 4.351,6.998 4.367,6.996 4.382,6.993 4.398,6.99 4.413,6.985 4.428,6.98 4.442,6.974 4.456,6.967 4.47,6.96 4.483,6.952 4.496,6.943 4.509,6.933 4.521,6.923 4.532,6.912 4.543,6.901 4.553,6.889 4.563,6.876 4.572,6.863 4.58,6.85 4.587,6.836 4.594,6.822 4.6,6.808 4.605,6.793 4.61,6.778 4.613,6.762 4.616,6.747 4.618,6.731 4.62,6.716
  silkscreen extent -3.3,8.3 -3.1,8.5

## Part data
C1 C3 C4_ C5 C6 C7 C8 C9 C10 C11 C12 C13 C14 C15 C16 C17 C18 C19 C20 C21 C22 C23 C24 C25 C26 C27 C28 C29 C30 C31 C32: "Capacitor", Publisher="Altium Limited"
  C1 C4_ C6: PackageReference=CAPR5-4X5, Published=23-Sep-2002
  C3 C5 C7 C8 C9 C10 C11 C12 C13 C14 C15 C16 C17 C18 C19 C20 C21 C22 C23 C24 C25 C26 C27 C28 C29 C30 C31 C32: LatestRevisionDate=17-Jul-2002, LatestRevisionNote="Re-released for DXP Platform.", PackageReference=RAD-0.3, Published=8-Jun-2000
C2: library part "Cap Pol 3mm", "Polarized Capacitor (Axial)", LatestRevisionDate=17-Jul-2002, LatestRevisionNote="Re-released for DXP Platform.", PackageReference=POLAR0.8, Published=8-Jun-2000, Publisher="Altium Limited"
D1 D6 D7 D9: library part "D Schottky", "Schottky Diode", Code_JEDEC=DO-214-AA, LatestRevisionDate=17-Jul-2002, LatestRevisionNote="Re-released for DXP Platform.", PackageReference=SMB, Published=8-Jun-2000, Publisher="Altium Limited"
D2 D3 D4 D8 D10 D11 D14 D15 D19 D20 D21 D22 D27 D28 D31 D32 D35 D36 D41 D42 D43 D44 D45 D46 D47 D50 D54 D56 D58 D61: library part LED0, "Typical INFRARED GaAs LED", LatestRevisionDate=08-Jul-2005, LatestRevisionNote="Mech Layer 1 removed.", PackageReference=LED-0, Published=8-Jun-2000, Publisher="Altium Limited"
D5 D23 D24 D25 D26 D29 D30 D33 D34 D37 D38 D39 D40 D48 D49 D51 D52 D53 D55 D57 D59 D60: "TVS DIODE 30V 48.4V DO214AC", MFR="Littelfuse Inc.", MPN=SMAJ30A, Solder=SMT
D12 D13 D16 D17 D18: library part SMAJ30CA, "TVS DIODE 30V 48.4V DO214AC", MFR="Littelfuse Inc.", MPN=SMAJ30A, Solder=SMT
F1: library part "Fuse 1", "Fuse", LatestRevisionDate=17-Jul-2002, LatestRevisionNote="Re-released for DXP Platform.", PackageReference=PIN-W2/E2.8, Published=8-Jun-2000, Publisher="Altium Limited"
J1: library part "Header 2", "Header, 2-Pin", LatestRevisionDate=17-Jul-2002, LatestRevisionNote="Re-released for DXP Platform.", Publisher="Altium Limited"
J2: Package=None, Availability=Unavailable, MF="{'manufacturer': u'Same Sky (Formerly CUI Devices)'}", MP=UJ20-C-H-G-MSMT-4-P16-TR, Price=None
J3: library part DB9_RA, "Receptacle Assembly, 9 Position, Right Angle", PackageDocument=O, DatasheetDocument=1-Sep-1999, Gender=Receptacle, LatestRevisionDate=17-Jul-2002, LatestRevisionNote="Re-released for DXP Platform.", Orientation="Right Angle", PackageReference=788750, Positions=9, Published=15-Jun-2001, Publisher="Altium Limited"
J4: library part "Header 3", "Header, 3-Pin", LatestRevisionDate=17-Jul-2002, LatestRevisionNote="Re-released for DXP Platform.", Publisher="Altium Limited"
J5: "Hanrun HR911105A RJ-45 Connector", MFR=HanRun, MPN=HR911105A, Solder=WAVE
J7: library part Con10, "Connector 10"
Q1: library part IRF9540, "HEXFET P-Channel Power MOSFET", ComponentLink1Description="Manufacturer Link", ComponentLink1URL=http://www.irf.com/, ComponentLink2Description=Datasheet, ComponentLink2URL=http://www.irf.com/product-info/datasheets/data/irf9540.pdf, DatasheetVersion=PD-9.421C, LatestRevisionDate=17-Jul-2002, LatestRevisionNote="Re-released for DXP Platform.", Note="Pin 2 is electrically connected to pin 4.", PackageDescription="TO, Thru-Hole, Vertical, Heatsink Mounted; 3 In-Line Leads; Pitch 2.54 mm", PackageReference=TO-220AB, PackageVersion=Feb-1997, Published=8-Jun-2000, Publisher="Altium Limited"
Q2 Q3 Q4 Q5 Q6 Q7 Q8 Q9: library part "C1815 HF SMD", "NPN transistor"
R1 R2 R3 R4 R5 R6 R7 R10 R11 R12 R13 R14 R15 R16 R17 R18 R19 R20 R21 R22 R23 R24 R25 R26 R27 R28 R29 R30 R31 R32 R33 R34 R35 R36 R37 R38 R39 R40 R41 R42 R43 R44 R45 R46 R47 R48 R49 R50 R51 R52 R53 R54 R55 R56 R57 R58 R59 R60 R61 R62 R63 R64 R65 R66 R67 RN1-1 RN1-2 RN1-3 RN1-4 RN1-5 RN1-6 RN2-1 RN2-2 RN2-3 RN2-4 RN2-5 RN2-6 RN3-1 RN3-2 RN3-3 RN3-4 RN3-5 RN3-6 RN4-1 RN4-2 RN4-3 RN4-4 RN4-5 RN4-6 RN5-1 RN5-2 RN5-3 RN5-4 RN6-1 RN6-2 RN6-3 RN6-4 RN7-1 RN7-2 RN7-3 RN7-4 RN8-1 RN8-2 RN8-3 RN8-4: "Resistor", LatestRevisionDate=17-Jul-2002, LatestRevisionNote="Re-released for DXP Platform.", PackageReference=AXIAL-0.3, Published=8-Jun-2000, Publisher="Altium Limited"
SW1 SW2: "Switch", LatestRevisionDate=17-Jul-2002, LatestRevisionNote="Re-released for DXP Platform.", PackageReference=SPST-2, Published=24-Mar-1999, Publisher="Altium Limited"
U1: "SIMPLE SWITCHER; 3A Step-Down Voltage Regulator", DigiKeyPartNumber=LM2576HVT-5.0-ND, Manufacturer="National Semiconductor", PackageTopMarking="NSUZXYTT*LM2576HVT*-5.0 P+", PowerWise=N, Code_JEDEC=TO-220-AB, ComponentLink1Description="LM2576HV Datasheet", ComponentLink1URL=http://www.national.com/ds/LM/LM2576HV.pdf, ComponentLink2Description="LM2576HV Web Page", ComponentLink2URL=http://www.national.com/pf/LM/LM2576HV.html, ComponentLink3Description="T05A Package Page", ComponentLink3URL=http://www.national.com/packaging/folders/t05a.html, CompType=Switcher, DatasheetVersion=Aug-2004, FirstPublished=4-Dec-2008, PackageDescription="TO-220, Molded, 5 Lead, Straight", PackageReference=T05A, PackageVersion="revJ, Jan-1992", PartNumber=LM2576HVT-5.0, PinCount=5, Publisher="Altium Limited", RoHS=O
U2: "ESD Protection for USB 2.0 High Speed", Manufacturer_Name=STMicroelectronics, Copyright="Copyright (C) 2025 Ultra Librarian. All rights reserved.", Manufacturer_Part_Number=USBLC6-2P6, RefDes=RefDes, Type=Type
U3: "<p>3A 1.5MHz 28V Step-Down Converter</p>", Manufacturer_Name="Monolithic Power Systems", Copyright="Copyright (C) 2026 Ultra Librarian. All rights reserved.", Manufacturer_Part_Number=MP1584EN-LF-Z, RefDes=RefDes, Type=Type
U4: library part LTC4412ES6TRMPBF, "Low Loss PowerPathâ„¢ Controller in ThinSOT", Manufacturer_Name="Analog Devices Inc", Copyright="Copyright (C) 2025 Ultra Librarian. All rights reserved.", Manufacturer_Part_Number=LTC4412ES6#TRMPBF, RefDes=RefDes, Type=Type
U5 U9: "Cắm", Chung_Loai=Cắm, Don_Vi=Con, Ma_Hang=MH003143, Ten_Linh_Kien="B0505S-1W SIP4 IC Converter DC-DC"
U6 U8 U11 U12 U13: library part IC_HCPL-3120-500E, "2.5A Gate Driver Optical Coupling 3750Vrms 1 Channel 8-DIP Gull Wing", Alternate Part Number-1=NA, Case/Package=SOIC8, Manufacturer="Broadcom Avago", Manufacturer Part Number=HCPL-3120-500E, Supplier Part Number-1=HCPL-3120-500E, Supplier-1=MOUSER
U7: "Enhanced RS-232 Line Drivers/Receivers", Manufacturer=Sipex, Volt=5V, ComponentLink1Description="Digikey Part Link", ComponentLink2Description="Open Datasheet", ComponentLink2URL=H:\LIBRARY\LIBRARY.Datasheet\, Data Rate (Max)=120kbps, Published=13-April-2009, Publisher="Hoang Nguyen", Vendor=Digikey
U10: "RS232 - RS485 (Same sn75176)"
U14: library part ch9121t_c45354919, "Type:Ethernet Transceiver Number of ports: Ethernet Speed Standards:10BASE-T；100BASE-TX Data Rate:100Mbit/s；10Mbit/s Voltage - Supply:3.2V~3.4V Voltage - Supply:3.2V~3.4V Operating Temperature:-40℃~+85℃ Operating Temperature:-40℃~+85℃ Features:Programmabl", JLCPCB Part Class="Extended Part", LCSC Part Name=网络串口透传芯片, Manufacturer=WCH(南京沁恒), ManufacturerPart=CH9121T, Operating Temperature=-40℃~+85℃, Voltage - Supply=3.2V~3.4V, AddInBom=yes, ConvertToPcb=yes, Data Rate=100Mbit/s；10Mbit/s, Datasheet=https://item.szlcsc.com/datasheet/CH9121T/47444202.html, Ethernet Speed Standards=10BASE-T；100BASE-TX, Features="Programmable LED indication；Power-on reset", FootprintName=TSSOP-20_L6.5-W4.4-P0.65-LS6.4-BL, ModelId=d00c537554e8428abe371c2c4fe2166f, ModelName=TSSOP-20_L6.5-W4.4-H1.0-LS6.4-P0.65, ModelTransform=251.969,255.906,0,90,0,0,0.0005,0,0, Supplier=LCSC, Supplier Footprint=TSSOP-20, SupplierPart=C45354919, Symbol=CH9121T_C45354919, Type="Ethernet Transceiver"
U15: library part ESP32-S3-WROOM-1, "Description", Manufacturer_Name="Espressif Systems", Copyright="Copyright (C) 2026 Ultra Librarian. All rights reserved.", Manufacturer_Part_Number=ESP32-S3-WROOM-1-N8, RefDes=RefDes, Type="Transceiver module"
U16 U17 U18 U19 U20 U21: library part "PC817 x 4", "PC817 OPTO"
Y1: library part XTAL, "Crystal Oscillator", LatestRevisionDate=17-Jul-2002, LatestRevisionNote="Re-released for DXP Platform.", PackageReference=R38, Published=8-Jun-2000, Publisher="Altium Limited"
L1 L2: Code_IEC=1005, Code_JEITA=0402, LatestRevisionDate=29-May-2009, LatestRevisionNote="IPC-7351 Footprint Added.", PackageDescription="Chip Inductor", PackageReference=0402-A, Published=8-Jun-2000, Publisher="Altium Limited"

## Via types
v1: diameter 0.8, hole 0.5, Top Layer to Bottom Layer, 74 vias

## Nets (pads, with @x,y where several pads share a name; then routed paths per layer and width w, separated by ;. In a path a pad name is that pad's centre, name@x,y a point inside that pad or via, vN(x,y) a via of type N, cw(c..) or ccw(c..) an arc to the next point about the centre after c; other vN are vias at no path point)
3.3V: C6.1 C17.1 C23.1 C24.2 C25.1 C32.1 D19.1 D20.1 D21.1 D22.1 D27.1 D28.1 D31.1 D32.1 D35.1 D36.1 D41.1 D42.1 D43.1 D44.1 L2.2 R12.2 R17.2 R20.2 R28.2 R29.2 R30.2 R32.1 R33.1 R34.2 R35.2 R36.2 R37.2 RN5-1.2 RN5-2.2 RN5-3.2 RN5-4.2 RN6-1.2 RN6-2.2 RN6-3.2 RN6-4.2 RN7-1.2 RN7-2.2 RN7-3.2 RN7-4.2 RN8-1.2 RN8-2.2 RN8-3.2 RN8-4.2 U8.7 U8.8 U13.7 U13.8 U14.3 U14.8 U14.18 U15.2 | length 202.8
  Top Layer w0.254: D21.1@-109.557,-49.195 D44.1@-81.998,-49.195 ; D20.1@-40.597,-5.461 D19.1@-40.597,-1.905 ; R36.2@-20.066,-13.589 R37.2@-14.859,-13.589 -14.795,-13.589 -14.287,-14.097 -14.287,-14.16 -9.734,-18.714 C32.1@-9.734,-31.609 ; C32.1@-9.734,-31.672 -9.164,-32.242 U15.2@-9.164,-34.684
  Top Layer w0.4: C6.1@-47.117,-69.85 -47.117,-63.119 L2.2@-45.72,-61.722
  Top Layer w0.5: RN8-1.2@-110.011,-17.527 RN5-4.2@-92.224,-17.527
  Bottom Layer w0.254: RN6-1.2@-89.69,-33.782 -79.707,-33.782 -76.278,-37.211 R33.1@-76.214,-37.211 -73.279,-37.211 -72.999,-37.491 U14.8@-72.999,-38.664 -72.999,-40.614 R32.1@-73.025,-40.64 ; U14.3@-69.749,-38.664 -69.749,-36.852 -68.965,-36.068 C24.2@-66.167,-36.068 ; U14.18@-69.749,-32.964 -69.749,-31.331 -69.088,-30.67 C25.1@-69.088,-30.607 C25.1@-68.846,-30.849 ; R34.2@-67.587,-3.2 -58.953,-3.2 R35.2@-58.928,-3.175 ; R29.2@-59.833,-30.849 -59.833,-29.436 -59.099,-28.702 -52.934,-28.702 -51.372,-30.264 -51.308,-30.264 -50.8,-30.772 R30.2@-50.8,-30.836
  Bottom Layer w0.4: R12.2@-50.673,-53.721 -47.773,-53.721 C17.1@-47.752,-53.7 -46.355,-53.7 ; -46.101,-53.7 -46.355,-53.7 ; -45.974,-53.7 -45.119,-53.7 U8.8@-45.085,-53.734 ; L2.2@-45.72,-61.722 -45.72,-57.346 -44.881,-56.507 R20.2@-44.881,-56.443 -45.085,-56.239 U8.8@-45.085,-53.734 ; U8.7@-43.815,-53.734 U8.8@-45.085,-53.734 ; R28.2@-40.132,-42.545 -40.386,-42.291 U13.8@-40.386,-39.497 ; U13.7@-39.116,-39.531 -39.751,-39.531 -39.785,-39.497 U13.8@-40.386,-39.497 ; -33.909,-37.719 -31.461,-40.167 R17.2@-31.461,-44.997 ; -46.355,-53.7 -46.355,-49.962 -46.364,-49.953 -46.364,-46.215 -46.355,-46.206 -46.355,-43.505 -46.155,-43.305 -46.155,-43.234 -43.171,-40.25 -43.171,-39.932 -42.735,-39.497 U13.8@-40.386,-39.497
  Bottom Layer w0.5: RN7-4.2@-109.883,-33.782 RN7-1.2@-102.287,-33.782 RN6-4.2@-97.31,-33.782 RN6-3.2@-94.77,-33.782 RN6-2.2@-92.23,-33.782 RN6-1.2@-89.69,-33.782
5V: C4_.1 D7.2 D8.1 Q1.3 R6.2 U3.7 U4.6 | length 6.3
  Top Layer w0.254: Q1.3@-26.187,-17.475 -25.324,-17.475 -24.638,-18.161 -24.638,-20.955 -25.171,-21.488 -25.823,-21.488 U4.6@-25.991,-21.656
5V_RS232: C9.2 C10.2 C14.2 C15.2 R14.2 R15.2 R16.2 R21.1 U5.4 U6.7 U6.8 U7.16 | length 73.1
  Bottom Layer w0.254: C9.2@-55.677,-72.865 -50.198,-72.865 -49.451,-73.612 -49.451,-73.866 -49.022,-74.295 -49.022,-80.899 -50.292,-82.169 R14.2@-52.578,-82.169 R15.2@-52.578,-84.709 ; C9.2@-55.551,-72.865 U5.4@-55.551,-69.387 -50.464,-69.387 -44.003,-62.926 C10.2@-37.521,-62.926 -36.35,-62.926 -35.268,-64.008 U7.16@-34.318,-64.008 ; R21.1@-41.529,-45.064 -40.026,-45.064 -39.603,-45.487 -39.603,-52.853 -38.678,-53.778 -37.795,-53.778 C14.2@-37.287,-54.286 ; C14.2@-37.287,-54.229 U6.8@-34.894,-54.229 ; U7.16@-34.647,-63.802 -34.441,-64.008 U7.16@-34.318,-64.008 ; R16.2@-34.647,-56.819 -34.926,-56.541 U6.8@-34.926,-54.242 U6.7@-33.656,-54.242 ; C15.2@-30.356,-61.124 -31.372,-61.124 -33.495,-63.247 -33.495,-63.802 -33.701,-64.008 U7.16@-34.318,-64.008
5V_RS485: C18.2 C20.2 C21.2 C22.2 R22.2 R23.2 R26.2 R27.2 R31.1 U9.4 U10.8 U11.7 U11.8 U12.7 U12.8 | length 18.3
  Bottom Layer w0.254: C21.2@-61.087,-39.751 -57.565,-39.751 U11.7@-57.531,-39.785 ; U11.8@-58.801,-39.785 -58.801,-42.164 R26.2@-58.547,-42.418 ; C18.2@-53.34,-20.193 -53.213,-20.32 U10.8@-51.054,-20.32 ; C22.2@-52.173,-39.65 -49.822,-39.65 U12.8@-49.784,-39.688 -49.149,-39.688 ; R27.2@-49.53,-42.418 -49.149,-42.037 -49.149,-39.688 ; U12.7@-48.514,-39.688 -49.149,-39.688 ; C20.2@-40.132,-25.908 U9.4@-37.084,-25.908
5VP: C2.1 C8.1 C19.1 D3.1 L1.2 Q1.2 U1.4 U4.1 U5.2 U9.2 | length 18.2
  Top Layer w0.254: Q1.2@-28.682,-18.415 -28.682,-21.593 U4.1@-28.619,-21.656 ; L1.2@-17.272,-64.389 -13.081,-64.389 C2.1@-10.16,-61.468
  Bottom Layer w0.254: C8.1@-60.757,-72.865 -60.631,-72.739 U5.2@-60.631,-69.387 ; C19.1@-40.132,-20.828 U9.2@-37.084,-20.828
24V: C1.1 D1.2 D2.1 D5.1 U1.1 | length 12
  Top Layer w0.254: D2.1@-14.648,-75.184 -14.648,-75.384 -14.225,-75.807 -14.025,-75.807 -12.177,-77.655 U1.1@-8.128,-77.655
  Bottom Layer w0.254: U1.1@-8.128,-77.655 -7.406,-76.933 -7.406,-76.341 -6.591,-75.527 -6.591,-75.273 -5.867,-74.549 D5.1@-5.613,-74.549
ACT: J5.11 U14.7 | length 19
  Bottom Layer w0.254: U14.7@-72.349,-38.664 -72.349,-36.579 -70.473,-34.703 -67.044,-34.703 -64.643,-32.302 -64.643,-24.892
D+: U2.4 U15.14
D-: U2.6 U15.13
ESP32_CFG2: R33.2 U14.11 U15.10 | length 3
  Bottom Layer w0.254: R33.2@-76.214,-34.925 -76.151,-34.925 -74.683,-33.457 -74.343,-33.457 -74.299,-33.413 U14.11@-74.299,-32.964
ESP32_EN1: U12.3 U15.7
ESP32_RX0: R20.1 U8.6 U15.36 | length 10.6
  Top Layer w0.254: v1(-17.533,-58.164) -17.524,-58.164 -12.974,-53.614 U15.36@-12.974,-52.184
  Bottom Layer w0.254: R20.1@-42.595,-56.443 -42.545,-56.394 U8.6@-42.545,-53.734
ESP32_RX1: R28.1 U13.6 U15.6 | length 33
  Top Layer w0.254: v1(-33.655,-32.004) -19.685,-32.004 -18.288,-33.401 -15.102,-33.401 -14.727,-33.777 -14.727,-33.858 -14.244,-34.341 U15.6@-14.244,-34.684
  Bottom Layer w0.254: R28.1@-37.846,-42.545 U13.6@-37.846,-39.531 -37.842,-39.527 -37.842,-37.969 -33.655,-33.782 v1(-33.655,-32.004)
ESP32_RX2: U14.14 U15.8
ESP32_TX0: U6.3 U15.37 | length 29.8
  Top Layer w0.254: v1(-16.51,-58.42) -11.704,-53.614 U15.37@-11.704,-52.184
  Bottom Layer w0.254: U6.3@-32.386,-48.079 -32.386,-48.904 -26.68,-54.61 -18.669,-54.61 -16.752,-56.527 -16.752,-58.031 -16.51,-58.272 v1(-16.51,-58.42)
ESP32_TX1: U11.3 U15.5 | length 47.1
  Top Layer w0.254: v1(-56.134,-31.496) -55.986,-31.496 -55.713,-31.223 -18.942,-31.223 -17.272,-32.893 -14.34,-32.893 -13.457,-33.777 -13.457,-33.858 -12.974,-34.341 U15.5@-12.974,-34.684
  Bottom Layer w0.254: U11.3@-56.261,-33.621 -56.197,-33.558 -56.197,-31.559 v1(-56.134,-31.496)
ESP32_TX2: U14.13 U15.9
GND: C1.2 C2.2 C4_.2 C6.2 C7.1 C8.2 C17.2 C19.2 C23.2 C24.1 C25.2 C26.1 C27.1 C28.1 C29.2 C30.1 C31.2 C32.2 D5.2 D6.1 D9.1 J1.2 J2.A1_B12 J2.B1_A12 J5.8 R1.1 R2.1 R3.1 R4.2 R5.2 R10.2 R11.1 R13.1 SW1.1 SW2.2 U1.3 U1.5 U2.2 U3.5 U4.3 U5.1 U8.5 U9.1 U13.5 U14.17 U15.1 U15.40 U15.41 U15.42 U15.43 U15.44 U15.45 U15.46 U15.47 U15.48 U15.49 U16.9 U16.11 U16.13 U16.15 U17.9 U17.11 U17.13 U17.15 U18.9 U18.11 U19.9 U19.11 | length 81.5
  Top Layer w0.254: U16.15@-111.571,-62.388 -111.571,-64.429 -111.422,-64.578 -109.093,-64.578 ; U16.13@-109.031,-62.388 -109.031,-64.516 -109.093,-64.578 ; U16.11@-106.491,-62.388 -106.491,-64.513 -106.426,-64.578 ; U16.9@-103.951,-62.388 -103.951,-64.513 -103.886,-64.578 ; U18.11@-94.324,-62.388 -94.324,-64.541 -94.361,-64.578 ; U18.9@-91.784,-62.388 -91.784,-64.487 -91.694,-64.578 ; U17.15@-87.212,-62.344 -87.212,-64.541 -87.249,-64.578 ; U17.13@-84.672,-62.344 -84.672,-64.541 -84.709,-64.578 ; U17.11@-82.132,-62.344 -82.132,-64.541 -82.169,-64.578 ; U17.9@-79.592,-62.344 -79.592,-64.541 -79.629,-64.578 ; U19.11@-69.94,-62.344 -69.94,-64.487 -69.85,-64.578 ; J5.8@-67.686,-19.558 -67.686,-21.087 -66.167,-22.606 C27.1@-64.897,-22.606 ; U19.9@-67.4,-62.344 -67.4,-64.349 -67.629,-64.578 -69.85,-64.578 ; -109.093,-64.578 -106.426,-64.578 ; -106.426,-64.578 -103.886,-64.578 ; -103.886,-64.578 -94.361,-64.578 ; -94.361,-64.578 -91.694,-64.578 ; -91.694,-64.578 -87.249,-64.578 ; -87.249,-64.578 -84.709,-64.578 ; -84.709,-64.578 -82.169,-64.578 ; -82.169,-64.578 -79.629,-64.578 ; -79.629,-64.578 -69.85,-64.578
  Bottom Layer w0.254: C25.2@-71.374,-30.607 -71.374,-30.67 -70.399,-31.645 U14.17@-70.399,-32.964 ; R4.2@-31.496,-3.175 R5.2@-28.461,-3.175
GND_RS232: C9.1 C10.1 C11.2 C14.1 C16.1 C21.1 C22.1 D12.2 D13.2 J3.5 U5.3 U6.5 U7.15 | length 69
  Bottom Layer w0.254: U5.3@-58.091,-69.387 -58.091,-72.737 C9.1@-57.963,-72.865 ; C22.1@-52.274,-37.465 C22.1@-52.173,-37.364 ; D12.2@-43.561,-85.115 -39.91,-85.115 D13.2@-39.866,-85.159 -39.866,-85.109 -39.142,-84.385 -36.276,-84.385 -34.463,-82.572 C11.2@-31.089,-82.572 -31.089,-76.2 ; C10.1@-37.521,-65.212 -37.455,-65.278 U7.15@-34.318,-65.278 -32.512,-65.278 -31.089,-66.701 -31.089,-73.914 ; C14.1@-37.287,-52 -31.693,-52 -31.116,-52.577 U6.5@-31.116,-54.242 ; J3.5@-34.326,-76.154 -31.288,-76.154 -31.242,-76.2 -31.089,-76.2 ; C16.1@-21.463,-71.755 -20.447,-71.755 -19.685,-72.517 -19.685,-75.67 -19.834,-75.819 -24.511,-75.819 -26.416,-73.914 -31.089,-73.914 ; -31.089,-76.2 -31.089,-73.914
GND_RS485: C18.1 C20.1 D16.1 D18.2 J4.3 U9.3 U10.5 U11.5 U12.5 | length 6.7
  Bottom Layer w0.254: D18.2@-52.578,-6.096 -51.943,-6.731 J4.3@-51.943,-9.398 ; C20.1@-40.132,-23.622 -39.878,-23.368 U9.3@-37.084,-23.368